# Altium PCB TFT_OLED_Board.PcbDoc
Units mm, origin at the board's own origin, x right, y up, seen from the top; angles counter-clockwise.
Board outline 96.51 x 142.34 mm, 2 copper layers (Top Layer, Bottom Layer); 24 components, 54 nets, 150 pads, 32 vias.
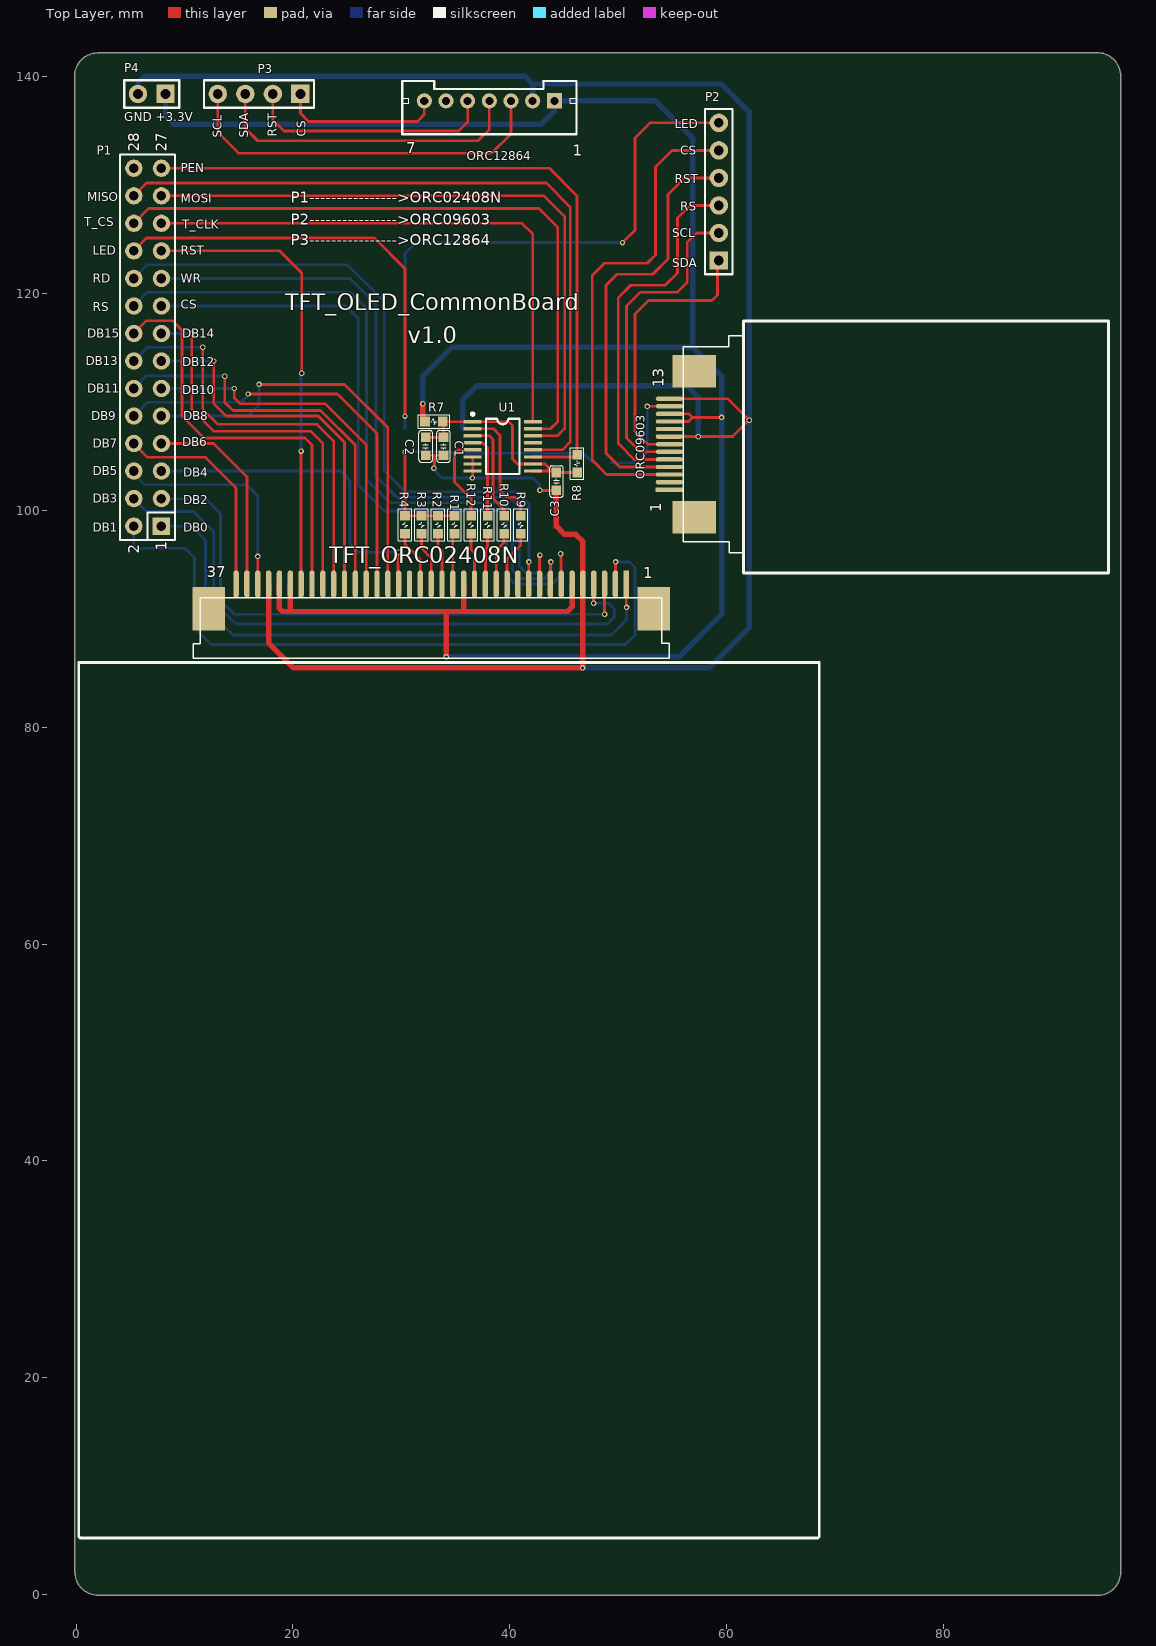
[diagram p0: Top Layer view]
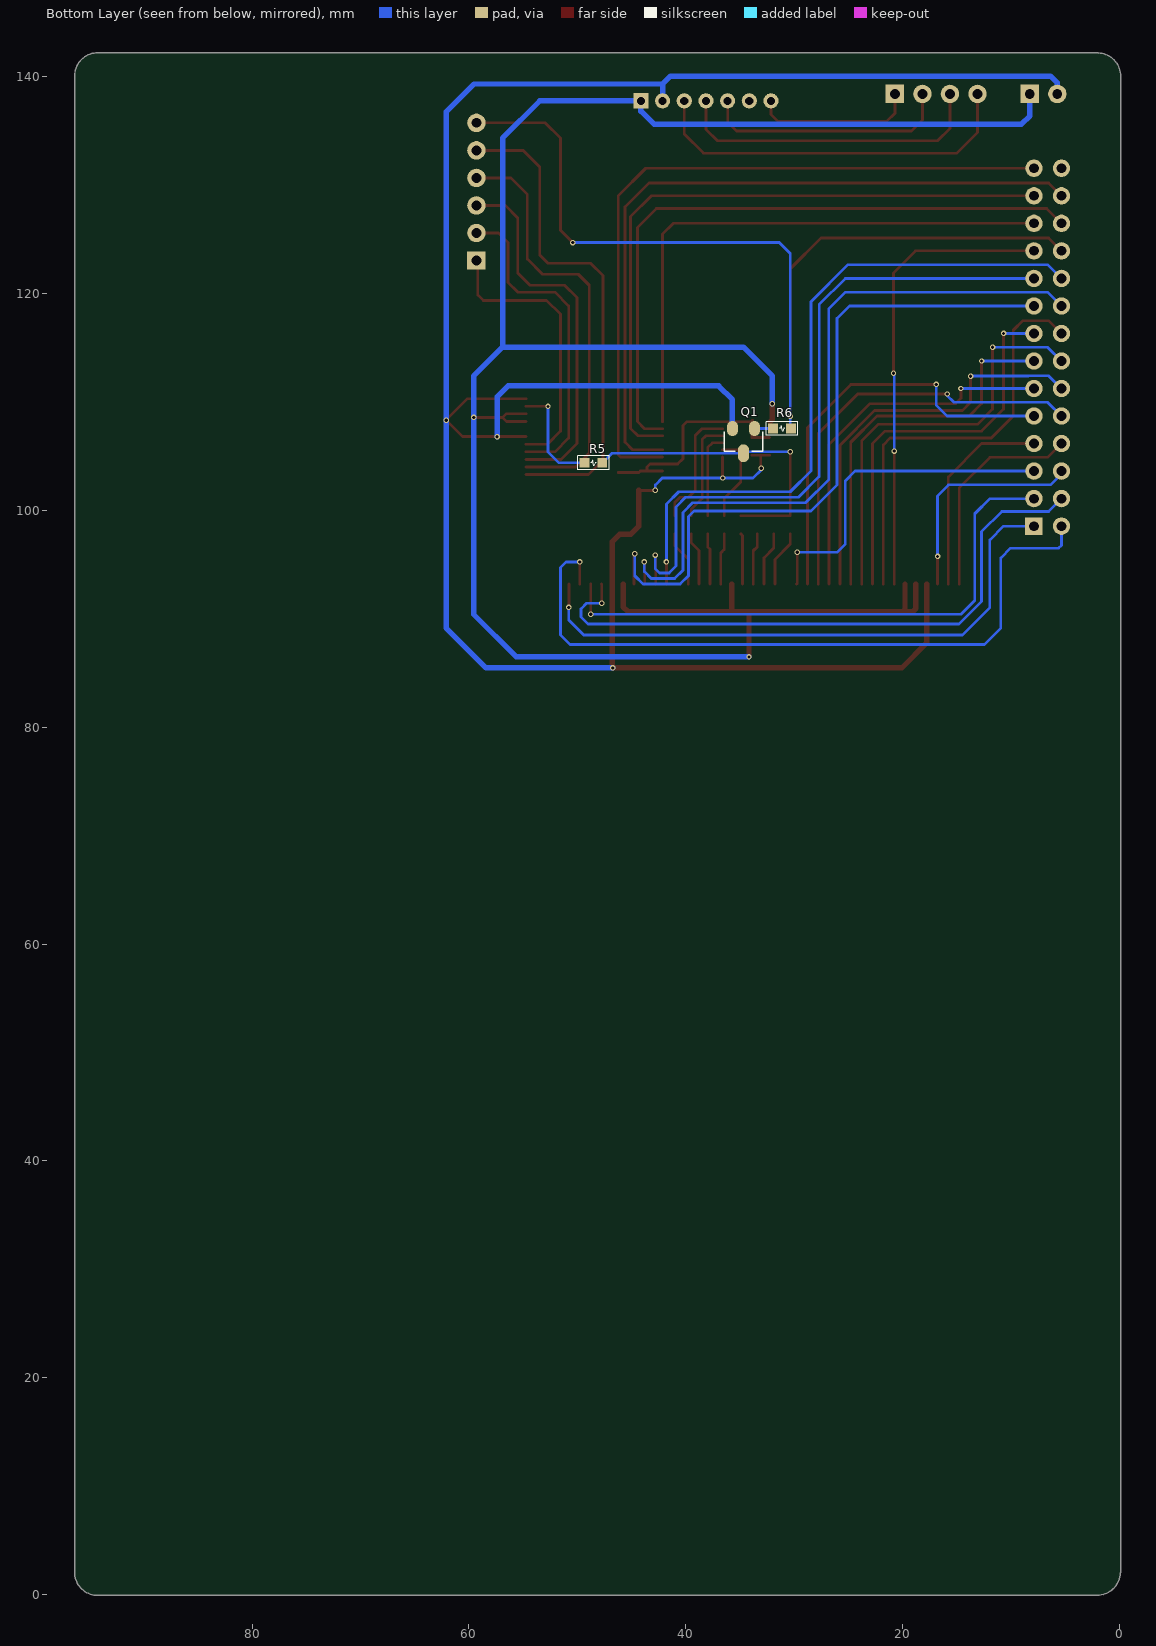
[diagram p1: Bottom Layer view, seen from below]

## Layer stack, top to bottom
Top Solder: solder mask 0.0102, Solder Resist, Dk 3.5
Top Layer: signal copper 0.0356
Dielectric 1: dielectric 0.32, FR-4, Dk 4.8
Bottom Layer: signal copper 0.0356
Bottom Solder: solder mask 0.0102, Solder Resist, Dk 3.5

## Board outline
2.031,-0.086 cw(c2.032,2.041) -0.094,1.955 cw(c0,2.041) -0.127,2.041 -0.127,140.08 -0.127,140.081 cw(c2,140.081) 1.947,142.208 cw(c2.032,142.113) 2.032,142.24 94.219,142.24 cw(c94.219,142.113) 94.229,142.24 cw(c94.219,140.081) 96.378,140.083 cw(c94.219,140.081) 96.378,140.081 ccw(c96.251,140.081) 96.378,140.083 96.378,140.081 96.378,2.032 ccw(c96.251,2.032) 96.378,2.034 96.378,2.032 cw(c94.251,2.032) 94.251,-0.095 cw(c94.251,0.032) 94.204,-0.086 2.032,-0.086 cw(c2.032,0.041)

## Design rules (kind name [scope] priority, off if disabled: settings)
Clearance [All] p1: gap=0.254 ignorepadtopadclearanceinfootprint=FALSE except(0: Arc-Hole Track-Hole SMDPad-Hole THPad-Hole Via-Hole Fill-Hole Poly-Hole Region-Hole Text-Hole)
PolygonConnect [All] p1: connectstyle=Relief reliefconductorwidth=0.254 reliefentries=4 polygonreliefangle="90 Angle" airgapwidth=0.254
RoutingVias [All] p1: holewidth=0.4 width=0.6 viastyle="Through Hole" minholewidth=0.3 minwidth=0.3 maxholewidth=0.711 maxwidth=1
SolderMaskExpansion [All] p1: expansion=0.102
Width [All] p1: maxlimit=1 minlimit=0.254 preferedwidth=0.254
30 further rules are at their usual default settings.

## Components (designator, comment, footprint, x,y, rotation, side; value= is the part's Value field where it differs from the comment)
C1 "10uF" C0603 33.909,105.918 r270 top
C2 "100nF" C0603 32.258,105.918 r270 top
C3 "100nF" C0603 44.323,102.679 r270 top
ORC09603 "TFT_LCD, ORC09603" "FPC  0.3  13P" 54.737,106.113 r270 top (schematic designator TFTLCD2)
ORC12864 "OLED, ORC12864, PCB" "PH2.0  7P" 38.132,137.795 r180 top (schematic designator OLED)
P1 "HDR  2.54MM  2X14" HDR-14X2 6.604,115.062 r90 top
P2 "HDR  2.54MM  1X6_M" HDR-1X6_M 59.309,129.413 r90 top
P3 "HDR  2.54MM  1X4" HDR-1X4 16.891,138.43 r180 top
P4 "HDR  2.54MM  1X2" HDR-1x2 6.985,138.43 r180 top
Q1 "S8050" "SOT 23" 34.671,106.426 r0 bottom
R1 "10R" R0603 34.925,98.679 r270 top
R2 "10R" R0603 33.401,98.679 r270 top
R3 "10R" R0603 31.877,98.679 r270 top
R4 "10R" R0603 30.353,98.679 r270 top
R5 "10R" R0603 48.514,104.394 r0 bottom
R6 "1k" R0603 31.115,107.569 r0 bottom
R7 "10R" R0603 33.02,108.204 r0 top
R8 "100k" R0603 46.228,104.331 r270 top
R9 "0R" R0603 41.021,98.679 r270 top
R10 "0R" R0603 39.497,98.679 r270 top
R11 "0R" R0603 37.973,98.679 r270 top
R12 "0R" R0603 36.449,98.679 r270 top
TFT_ORC02408N "TFTLCD, ORC02408N" "FPC  1.0  37P 0.6" 32.793,93.193 r0 top (schematic designator TFT_LCD1)
U1 "XPT2046" "TSSOP 16" 39.37,105.918 r0 top

## Footprints (in the part's own frame and the unit in brackets; to place one, negate y for a bottom-side part, rotate by r counter-clockwise, add the part's x,y. Pads: shape width x height; smd on the part's side, far side on the other; paste and mask are expansions set on the pad)
C0603 [mil] "0603-100nF/25V    104K    贴片层叠电容"
  rect 35x35 smd: 1(-32.5,0) 2(32.5,0)
  silkscreen extent -58,-25 58,25, body extent -31,-16 32,16, height 32
"FPC  0.3  13P" [mm] "13 Pins"
  rect 3x4 smd: 0(-6.72,2.289) 0(6.72,2.289)
  rect 0.4x2.5 smd: 1(4.2,0)
  oval 0.4x2.5 smd: 2(3.5,0) 3(2.8,0) 4(2.1,0) 5(1.4,0) 6(0.7,0) 7(0,0) 8(-0.7,0) 9(-1.4,0) 10(-2.1,0) 11(-2.8,0) 12(-3.5,0) 13(-4.2,0)
  silkscreen extent -10,1.29 10,6.83
"FPC  1.0  37P 0.6" [mm] "37 Pins"
  rect 3x4 smd: 0(-20.545,-2.263) 0(20.495,-2.263)
  rect 0.5x2.5 smd: 1(17.975,0.025)
  oval 0.5x2.5 smd: 2(16.975,0.025) 3(15.975,0.025) 4(14.975,0.025) 5(13.975,0.025) 6(12.975,0.025) 7(11.975,0.025) 8(10.975,0.025) 9(9.975,0.025) 10(8.975,0.025) 11(7.975,0.025) 12(6.975,0.025) 13(5.975,0.025) 14(4.975,0.025) 15(3.975,0.025) 16(2.975,0.025) 17(1.975,0.025) 18(0.975,0.025) 19(-0.025,0.025) 20(-1.025,0.025) 21(-2.025,0.025) 22(-3.025,0.025) 23(-4.025,0.025) 24(-5.025,0.025) 25(-6.025,0.025) 26(-7.025,0.025) 27(-8.025,0.025) 28(-9.025,0.025) 29(-10.025,0.025) 30(-11.025,0.025) 31(-12.025,0.025) 32(-13.025,0.025) 33(-14.025,0.025) 34(-15.025,0.025) 35(-16.025,0.025) 36(-17.025,0.025) 37(-18.025,0.025)
  silkscreen extent -21.97,-6.81 21.92,-1.27
HDR-1x2 [mm] "排针，2脚"
  rect 1.7x1.7 hole 0.9: 1(-1.27,0)
  round 1.7 hole 0.9: 2(1.27,0)
  silkscreen extent -2.54,-1.27 2.54,1.27, body extent -2.54,-1.27 2.54,1.27, height 8.5
HDR-1X4 [mm] "排针，4脚"
  rect 1.7x1.7 hole 0.9: 1(-3.81,0)
  round 1.7 hole 0.9: 2(-1.27,0) 3(1.27,0) 4(3.81,0)
  silkscreen extent -5.08,-1.27 5.08,1.27, body extent -5.08,-1.27 5.08,1.27, height 8.5
HDR-1X6_M [mm] "排母，6脚"
  rect 1.7x1.7 hole 0.9: 1(-6.35,0)
  round 1.7 hole 0.9: 2(-3.81,0) 3(-1.27,0) 4(1.27,0) 5(3.81,0) 6(6.35,0)
  silkscreen extent -7.62,-1.27 7.62,1.27, body extent -7.62,-1.27 7.62,1.27, height 8.5
HDR-14X2 [mm] "双排排针，14x2脚"
  rect 1.6x1.6 hole 0.9: 1(-16.51,-1.27)
  round 1.6 hole 0.9: 2(-16.51,1.27) 3(-13.97,-1.27) 4(-13.97,1.27) 5(-11.43,-1.27) 6(-11.43,1.27) 7(-8.89,-1.27) 8(-8.89,1.27) 9(-6.35,-1.27) 10(-6.35,1.27) 11(-3.81,-1.27) 12(-3.81,1.27) 13(-1.27,-1.27) 14(-1.27,1.27) 15(1.27,-1.27) 16(1.27,1.27) 17(3.81,-1.27) 18(3.81,1.27) 19(6.35,-1.27) 20(6.35,1.27) 21(8.89,-1.27) 22(8.89,1.27) 23(11.43,-1.27) 24(11.43,1.27) 25(13.97,-1.27) 26(13.97,1.27) 27(16.51,-1.27) 28(16.51,1.27)
  silkscreen extent -17.78,-2.54 17.78,2.54, body extent -17.78,-2.54 17.78,2.54, height 8.5
"PH2.0  7P" [mm] "接插件/1A"
  rect 1.4x1.4 hole 0.75: 1(-6,0)
  round 1.4 hole 0.75: 2(-4,0) 3(-2,0) 4(0,0) 5(2,0) 6(4,0) 7(6,0)
  silkscreen extent -8.03,-1.82 8.03,3.08, body extent -7.95,-1.7 7.95,3, height 6.02
R0603 [mil]
  rect 35x35 smd: 1(-32.5,0) 2(32.5,0)
  silkscreen extent -58,-25 58,25, body extent -31,-16 31,15, height 16
"SOT 23" [mil]
  oval 40x55 smd: 1(-40,-45) 2(40,-45)
  oval 40x65 smd: 3(0,45)
  silkscreen extent -70,-33 70,37, body extent -59,-47 59,47, height 41
"TSSOP 16" [mm] "2046"
  rect 1.65x0.3 smd: 1(-2.775,2.275) 2(-2.775,1.625) 3(-2.775,0.975) 4(-2.775,0.325) 5(-2.775,-0.325) 6(-2.775,-0.975) 7(-2.775,-1.625) 8(-2.775,-2.275) 9(2.775,-2.275) 10(2.775,-1.625) 11(2.775,-0.975) 12(2.775,-0.325) 13(2.775,0.325) 14(2.775,0.975) 15(2.775,1.625) 16(2.775,2.275)
  silkscreen extent -2.9,-2.55 1.55,3.1, body extent -3.2,-2.5 3.2,2.5, height 1.1

## Part data
C1: library part "CAP 1206-10uF/50V", "1206-10UF/50V  106K 贴片层叠电容"
C2 C3: library part "CAP 1206-100nF/50V", "1206-100nF/50V-J5 104K 贴片层叠电容"
ORC09603: library part TFT_ORC09603
ORC12864: library part OLED_ORC12864
Q1: library part NPN
R1 R2 R3 R4 R5 R6 R7 R8 R9 R10 R11 R12: library part "RES  0603  0R", "0603  0R  5%  贴片电阻", 助记码=0603, 物料代码=3.01.0, 物料名称=0603
TFT_ORC02408N: library part TFT_ORC02408N
U1: "HR2046贴片IC", 助记码=HR, 物料代码=3.0

## Via types
v1: diameter 0.5, hole 0.3, Top Layer to Bottom Layer, 32 vias

## Nets (pads, with @x,y where several pads share a name; then routed paths per layer and width w, separated by ;. In a path a pad name is that pad's centre, name@x,y a point inside that pad or via, vN(x,y) a via of type N, cw(c..) or ccw(c..) an arc to the next point about the centre after c; other vN are vias at no path point)
3.3V: ORC09603.10 ORC09603.11 ORC12864.1 P4.1 R7.1 TFT_ORC02408N.6 TFT_ORC02408N.16 TFT_ORC02408N.32 TFT_ORC02408N.33 | length 204.4
  Top Layer w0.254: TFT_ORC02408N.32@19.685,93.135 TFT_ORC02408N.32 ; 35.768,90.724 35.814,90.678 ; ORC09603.10 56.524,108.213 56.896,108.585 ; ORC09603.11 56.568,108.913 56.896,108.585 ; v1(59.563,108.585) 56.896,108.585
  Top Layer w0.5: TFT_ORC02408N.33 18.768,90.96 19.05,90.678 19.685,90.678 ; TFT_ORC02408N.32 19.768,90.849 19.939,90.678 34.036,90.678 ; v1(32.004,109.855) 32.004,108.394 R7.1 ; v1(34.163,86.487) 34.163,90.551 34.036,90.678 ; 35.768,90.724 TFT_ORC02408N.16 ; TFT_ORC02408N.6 45.768,91.107 45.339,90.678 35.814,90.678 34.036,90.678
  Bottom Layer w0.5: P4.1 8.255,136.398 9.017,135.636 42.926,135.636 44.132,136.842 ORC12864.1 53.467,137.795 56.896,134.366 56.896,115.062 ; v1(32.004,109.855) 32.004,112.395 34.671,115.062 56.896,115.062 ; v1(34.163,86.487) 55.626,86.487 59.563,90.424 v1(59.563,108.585) 59.563,112.395 56.896,115.062
CS1: P1.17 TFT_ORC02408N.7 | length 64.8
  Top Layer w0.254: v1(44.704,96.012) 44.768,95.948 TFT_ORC02408N.7
  Bottom Layer w0.254: P1.17 24.892,118.872 26.035,117.729 26.035,102.362 28.448,99.949 39.243,99.949 39.751,99.441 39.751,93.98 40.513,93.218 43.942,93.218 44.704,93.98 v1(44.704,96.012)
CS2: ORC09603.7 P2.1 | length 26
  Top Layer w0.254: ORC09603.7 52.764,106.113 51.562,107.315 51.562,118.11 52.832,119.38 58.674,119.38 59.182,119.888 P2.1@59.182,123.063
CS3: ORC12864.7 P3.1 | length 15.1
  Top Layer w0.254: P3.1 20.701,136.652 21.463,135.89 31.496,135.89 32.132,136.526 ORC12864.7
DB0: P1.1 TFT_ORC02408N.1 | length 54.6
  Top Layer w0.254: TFT_ORC02408N.1 50.768,91.091 v1(50.8,91.059)
  Bottom Layer w0.254: P1.1 10.668,98.552 11.938,97.282 11.938,91.059 14.478,88.519 49.403,88.519 50.8,89.916 v1(50.8,91.059)
DB1: P1.2 TFT_ORC02408N.2 | length 66.2
  Top Layer w0.254: TFT_ORC02408N.2 49.784,93.234 v1(49.784,95.25)
  Bottom Layer w0.254: P1.2 5.334,96.774 5.588,96.52 10.033,96.52 10.922,95.631 10.922,89.154 12.446,87.63 50.673,87.63 51.562,88.519 51.562,94.742 51.054,95.25 v1(49.784,95.25)
DB2: P1.3 TFT_ORC02408N.3 | length 52.8
  Top Layer w0.254: v1(48.768,90.424) TFT_ORC02408N.3
  Bottom Layer w0.254: P1.3 11.938,101.092 13.335,99.695 13.335,91.694 14.605,90.424 v1(48.768,90.424)
DB3: P1.4 TFT_ORC02408N.4 | length 57.8
  Top Layer w0.254: v1(47.752,91.44) 47.752,93.202 TFT_ORC02408N.4
  Bottom Layer w0.254: P1.4 6.515,99.911 10.833,99.911 12.7,98.044 12.7,91.611 14.776,89.535 49.022,89.535 49.657,90.17 49.657,90.924 49.141,91.44 v1(47.752,91.44)
DB4: P1.5 TFT_ORC02408N.22 | length 31.3
  Top Layer w0.254: v1(29.718,96.139) 29.718,93.268 TFT_ORC02408N.22
  Bottom Layer w0.254: P1.5 24.384,103.632 25.273,102.743 25.273,96.901 26.035,96.139 v1(29.718,96.139)
DB5: P1.6 TFT_ORC02408N.35 | length 20.7
  Top Layer w0.254: v1(16.764,95.758) 16.764,93.222 TFT_ORC02408N.35
  Bottom Layer w0.254: P1.6 5.334,103.378 6.35,102.362 15.748,102.362 16.764,101.346 v1(16.764,95.758)
DB6: P1.7 TFT_ORC02408N.36 | length 19.1
  Top Layer w0.254: P1.7 12.7,106.172 15.768,103.104 TFT_ORC02408N.36
DB7: P1.8 TFT_ORC02408N.37 | length 20
  Top Layer w0.254: P1.8 6.604,104.902 11.938,104.902 14.768,102.072 TFT_ORC02408N.37
DB8: P1.9 TFT_ORC02408N.23 | length 39.3
  Top Layer w0.254: v1(16.891,111.633) 24.765,111.633 28.768,107.63 TFT_ORC02408N.23
  Bottom Layer w0.254: P1.9 15.875,108.712 16.891,109.728 v1(16.891,111.633)
DB9: P1.10 TFT_ORC02408N.24 | length 38.7
  Top Layer w0.254: v1(15.875,110.744) 24.13,110.744 27.768,107.106 TFT_ORC02408N.24
  Bottom Layer w0.254: P1.10 6.604,109.982 15.24,109.982 15.875,110.617 v1(15.875,110.744)
DB10: P1.11 TFT_ORC02408N.25 | length 34.4
  Top Layer w0.254: v1(14.605,111.252) 14.605,110.363 15.113,109.855 22.987,109.855 26.768,106.074 TFT_ORC02408N.25
  Bottom Layer w0.254: P1.11 v1(14.605,111.252)
DB11: P1.12 TFT_ORC02408N.26 | length 37.8
  Top Layer w0.254: v1(13.716,112.395) 13.716,109.982 14.478,109.22 22.562,109.22 25.768,106.014 TFT_ORC02408N.26
  Bottom Layer w0.254: P1.12 6.515,112.433 8.363,112.433 8.401,112.395 v1(13.716,112.395)
DB12: P1.13 TFT_ORC02408N.27 | length 35.4
  Top Layer w0.254: v1(12.7,113.792) 12.7,109.855 13.843,108.712 22.352,108.712 24.768,106.296 TFT_ORC02408N.27
  Bottom Layer w0.254: P1.13 v1(12.7,113.792)
DB13: P1.14 TFT_ORC02408N.28 | length 39.1
  Top Layer w0.254: v1(11.684,115.062) 11.684,109.347 13.081,107.95 22.244,107.95 23.768,106.426 TFT_ORC02408N.28
  Bottom Layer w0.254: P1.14 6.604,115.062 v1(11.684,115.062)
DB14: P1.15 TFT_ORC02408N.29 | length 36.1
  Top Layer w0.254: v1(10.668,116.332) 10.668,109.347 12.7,107.315 21.625,107.315 22.768,106.172 TFT_ORC02408N.29
  Bottom Layer w0.254: P1.15 v1(10.668,116.332)
DB15: P1.16 TFT_ORC02408N.30 | length 39.1
  Top Layer w0.254: P1.16 6.515,117.513 8.89,117.513 9.779,116.624 9.779,108.712 11.811,106.68 21.133,106.68 21.768,106.045 TFT_ORC02408N.30
GND: C1.2 C2.2 C3.2 ORC09603.8 ORC09603.13 ORC12864.2 P4.2 Q1.2 TFT_ORC02408N.5 TFT_ORC02408N.34 U1.6 U1.7 U1.8 | length 241
  Top Layer w0.254: C2.2 33.084,105.093 ; v1(33.02,103.886) 33.084,103.95 33.084,105.093 ; C1.2 33.084,105.093 ; v1(36.576,102.997) 36.595,103.016 U1.8 U1.7 U1.6 ; v1(42.799,101.854) C3.2 ; ORC09603.8 60.585,106.813 v1(62.103,108.331) 60.121,110.313 ORC09603.13
  Top Layer w0.5: TFT_ORC02408N.34 17.768,87.769 20.066,85.471 v1(46.736,85.471) 46.768,85.503 TFT_ORC02408N.5 46.768,97.123 46.101,97.79 45.085,97.79 44.323,98.552 C3.2
  Bottom Layer w0.254: v1(33.02,103.886) 33.02,103.759 33.782,102.997 v1(36.576,102.997) 42.164,102.997 42.799,102.362 v1(42.799,101.854)
  Bottom Layer w0.5: P4.2 5.715,139.446 6.35,140.081 41.402,140.081 42.132,139.351 ; Q1.2 35.687,110.236 36.957,111.506 56.388,111.506 57.404,110.49 v1(57.404,106.807) ; ORC12864.2 42.132,139.351 ; v1(46.736,85.471) 58.42,85.471 62.103,89.154 v1(62.103,108.331) 62.103,136.779 59.531,139.351 42.132,139.351
LED_CTRL: P1.22 P2.6 R6.1 | length 95.2
  Top Layer w0.254: P1.22 6.515,125.133 27.521,125.133 30.353,122.301 v1(30.353,108.712) ; v1(50.419,124.714) 51.562,125.857 51.562,134.366 52.959,135.763 P2.6@59.182,135.763
  Bottom Layer w0.254: R6.1 30.353,107.632 v1(30.353,108.712) 30.353,123.698 31.369,124.714 v1(50.419,124.714)
LED_K: Q1.3 R1.1 R2.1 R3.1 R4.1 R5.1 | length 28.2
  Top Layer w0.254: v1(30.353,105.41) R4.1 R3.1 R2.1 R1.1
  Bottom Layer w0.254: v1(30.353,105.41) 34.544,105.41 Q1.3 46.799,105.283 R5.1
NetC1_1: C1.1 C2.1 C3.1 R7.2 R8.2 U1.1 U1.9 U1.10 | length 21
  Top Layer w0.254: C2.1 C1.1 R7.2@33.909,108.267 ; R7.2@33.846,108.331 R7.2@33.909,108.267 ; U1.9 43.561,103.643 ; R8.2 C3.1 44.185,103.643 43.561,103.643 ; R7.2@33.909,108.267 33.983,108.193 U1.1 39.889,108.193 40.259,107.823 40.259,104.775 40.741,104.293 U1.10 43.281,104.293 43.561,104.013 43.561,103.643
NetQ1_1: Q1.1 R6.2 | length 1.7
  Bottom Layer w0.254: R6.2 Q1.1
NetR1_2: R1.2 TFT_ORC02408N.17 | length 4.7
  Top Layer w0.254: TFT_ORC02408N.17 34.768,97.697 R1.2
NetR2_2: R2.2 TFT_ORC02408N.18 | length 4.8
  Top Layer w0.254: R2.2 33.401,96.647 33.768,96.28 TFT_ORC02408N.18
NetR3_2: R3.2 TFT_ORC02408N.19 | length 5
  Top Layer w0.254: R3.2 31.877,96.52 32.768,95.629 TFT_ORC02408N.19
NetR4_2: R4.2 TFT_ORC02408N.20 | length 5.2
  Top Layer w0.254: R4.2 30.353,96.901 31.768,95.486 TFT_ORC02408N.20
NetR5_2: ORC09603.12 R5.2 | length 10
  Top Layer w0.254: v1(52.705,109.601) 52.717,109.613 ORC09603.12
  Bottom Layer w0.254: R5.2 51.689,104.394 52.705,105.41 v1(52.705,109.601)
NetR9_2: R9.2 TFT_ORC02408N.12 | length 5.2
  Top Layer w0.254: TFT_ORC02408N.12 39.768,95.521 41.021,96.774 R9.2
NetR10_2: R10.2 TFT_ORC02408N.13 | length 4.9
  Top Layer w0.254: TFT_ORC02408N.13 38.768,96.299 39.497,97.028 R10.2
NetR11_2: R11.2 TFT_ORC02408N.14 | length 4.7
  Top Layer w0.254: TFT_ORC02408N.14 37.768,96.442 37.973,96.647 R11.2
NetR12_2: R12.2 TFT_ORC02408N.15 | length 4.8
  Top Layer w0.254: R12.2 36.449,96.393 36.768,96.074 TFT_ORC02408N.15
RD1: P1.20 TFT_ORC02408N.10 | length 62.7
  Top Layer w0.254: TFT_ORC02408N.10 41.768,95.235 v1(41.783,95.25)
  Bottom Layer w0.254: P1.20 6.604,122.682 25.019,122.682 28.448,119.253 28.448,103.632 30.353,101.727 40.64,101.727 41.783,100.584 v1(41.783,95.25)
RS1: P1.18 TFT_ORC02408N.8 | length 65.5
  Top Layer w0.254: TFT_ORC02408N.8 43.768,95.203 v1(43.815,95.25)
  Bottom Layer w0.254: P1.18 6.604,120.142 25.273,120.142 26.797,118.618 26.797,102.87 28.956,100.711 39.37,100.711 40.259,99.822 40.259,94.488 41.021,93.726 43.18,93.726 43.815,94.361 v1(43.815,95.25)
RS2: ORC09603.5 P2.3 | length 34.5
  Top Layer w0.254: ORC09603.5 51.497,104.713 50.038,106.172 50.038,119.634 51.181,120.777 54.356,120.777 55.499,121.92 55.499,127 56.642,128.143 P2.3
RST1: P1.21 TFT_ORC02408N.31 | length 42.5
  Top Layer w0.254: P1.21 18.796,123.952 20.828,121.92 v1(20.828,112.649) ; TFT_ORC02408N.31 v1(20.768,105.477)
  Bottom Layer w0.254: v1(20.768,105.477) 20.768,112.589 v1(20.828,112.649)
RST2: ORC09603.6 P2.2 | length 30
  Top Layer w0.254: ORC09603.6 52.067,105.413 50.8,106.68 50.8,118.872 52.07,120.142 55.499,120.142 56.388,121.031 56.388,124.714 57.277,125.603 P2.2@59.182,125.603
RST3: ORC12864.5 P3.2 | length 23.1
  Top Layer w0.254: P3.2 18.161,136.017 19.177,135.001 35.306,135.001 36.132,135.827 ORC12864.5
SCL2: ORC09603.4 P2.4 | length 39.9
  Top Layer w0.254: ORC09603.4 50.165,104.013 48.895,105.283 48.895,120.777 49.911,121.793 53.213,121.793 54.61,123.19 54.61,129.159 56.134,130.683 P2.4
SCL3: ORC12864.3 P3.4 | length 35.2
  Top Layer w0.254: P3.4 13.081,134.874 14.986,132.969 38.354,132.969 40.132,134.747 ORC12864.3
SDA2: ORC09603.3 P2.5 | length 45.9
  Top Layer w0.254: ORC09603.3 48.96,103.313 47.625,104.648 47.625,121.666 48.768,122.809 52.705,122.809 53.467,123.571 53.467,131.699 54.991,133.223 P2.5
SDA3: ORC12864.4 P3.3 | length 29.2
  Top Layer w0.254: P3.3 15.621,135.255 16.764,134.112 37.084,134.112 38.132,135.16 ORC12864.4
T_CLK: P1.23 U1.16 | length 52
  Top Layer w0.254: P1.23 41.148,126.492 42.145,125.495 U1.16
T_CS: P1.24 U1.15 | length 60.9
  Top Layer w0.254: P1.24 6.693,127.851 42.71,127.851 44.45,126.111 44.45,108.204 43.789,107.543 U1.15
T_MISO: P1.26 U1.12 | length 67.1
  Top Layer w0.254: P1.26 6.515,130.213 43.396,130.213 45.593,128.016 45.593,106.299 44.887,105.593 U1.12
T_MOSI: P1.25 U1.14 | length 60.8
  Top Layer w0.254: P1.25 43.18,129.032 45.085,127.127 45.085,107.569 44.409,106.893 U1.14
T_PEN: P1.27 R8.1 U1.11 | length 67.5
  Top Layer w0.254: P1.27 43.688,131.572 46.228,129.032 R8.1 46.015,104.943 U1.11
WR1: P1.19 TFT_ORC02408N.9 | length 62.8
  Top Layer w0.254: TFT_ORC02408N.9 42.768,95.854 v1(42.799,95.885)
  Bottom Layer w0.254: P1.19 25.273,121.412 27.686,118.999 27.686,103.124 29.591,101.219 40.005,101.219 40.894,100.33 40.894,94.869 41.529,94.234 42.418,94.234 42.799,94.615 v1(42.799,95.885)
X+: R9.1 U1.2 | length 11.4
  Top Layer w0.254: U1.2 38.507,107.543 39.116,106.934 39.116,101.854 39.751,101.219 40.513,101.219 41.021,100.711 R9.1
X-: R11.1 U1.4 | length 7.9
  Top Layer w0.254: U1.4 37.521,106.243 37.973,105.791 R11.1
Y+: R10.1 U1.3 | length 9.5
  Top Layer w0.254: U1.3 38.141,106.893 38.481,106.553 38.481,101.092 39.497,100.076 R10.1
Y-: R12.1 U1.5 | length 8.2
  Top Layer w0.254: R12.1 36.449,101.092 34.925,102.616 34.925,105.283 35.235,105.593 U1.5
pads on no net: ORC09603.0 ORC09603.1 ORC09603.2 ORC09603.9 ORC12864.6 P1.28 TFT_ORC02408N.0 TFT_ORC02408N.11 TFT_ORC02408N.21 U1.13

## Silkscreen, mask and mechanical layers (free items; w line width, h text height)
Top Overlay:
  lines w0.254: 0.254,5.334 0.254,85.979 68.58,85.979 68.58,5.334 68.453,5.207 0.381,5.207 0.254,5.334 ; 61.595,94.234 95.25,94.234 95.25,117.475 61.595,117.475 61.595,94.234
  text "GND" at 4.445,135.89 h0.8
  text "+3.3V" at 7.366,135.89 h0.8
  text "LED" at 55.245,135.255 h0.8
  text "RST" at 18.542,134.493 h0.8 r90
  text "CS" at 21.209,134.493 h0.8 r90
  text "SCL" at 13.462,134.366 h0.8 r90
  text "SDA" at 15.875,134.366 h0.8 r90
  text "7" at 30.48,132.969 h1
  text "CS" at 55.753,132.842 h0.8
  text "1" at 45.847,132.715 h1
  text "PEN" at 9.652,131.191 h0.8
  text "RST" at 55.245,130.175 h0.8
  text "MISO" at 1.016,128.524 h0.8
  text "MOSI" at 9.652,128.397 h0.8
  text "P1---------------->ORC02408N" at 19.812,128.397 h1
  text "RS" at 55.753,127.635 h0.8
  text "P2---------------->ORC09603" at 19.812,126.365 h1
  text "T_CS" at 0.762,126.238 h0.8
  text "T_CLK" at 9.779,125.984 h0.8
  text "SCL" at 54.991,125.222 h0.8
  text "P3---------------->ORC12864" at 19.812,124.46 h1
  text "LED" at 1.524,123.571 h0.8
  text "RST" at 9.652,123.571 h0.8
  text "SDA" at 54.991,122.428 h0.8
  text "RD" at 1.524,121.031 h0.8
  text "WR" at 9.652,121.031 h0.8
  text "CS" at 9.652,118.618 h0.8
  text "TFT_OLED_CommonBoard" at 19.304,118.491 h1.5
  text "RS" at 1.524,118.364 h0.8
  text "DB15" at 1.016,115.951 h0.8
  text "DB14" at 9.779,115.951 h0.8
  text "v1.0" at 30.607,115.443 h1.5
  text "DB13" at 0.889,113.411 h0.8
  text "DB12" at 9.779,113.284 h0.8
  text "13" at 54.229,111.379 h1 r90
  text "DB11" at 1.016,110.871 h0.8
  text "DB10" at 9.779,110.744 h0.8
  text "DB9" at 1.397,108.331 h0.8
  text "DB8" at 9.906,108.331 h0.8
  text "DB6" at 9.779,105.918 h0.8
  text "DB7" at 1.524,105.791 h0.8
  text "DB5" at 1.524,103.251 h0.8
  text "DB4" at 9.906,103.124 h0.8
  text "DB3" at 1.524,100.711 h0.8
  text "DB2" at 9.906,100.584 h0.8
  text "1" at 53.975,99.822 h1 r90
  text "DB1" at 1.524,98.044 h0.8
  text "DB0" at 9.906,98.044 h0.8
  text "37" at 12.065,93.853 h1
  text "1" at 52.324,93.726 h1
Mechanical 1:
  lines w0.254: 0,2.041 0,140.081 cw(c2,140.081) 2,142.081 ; 0.032,2.041 ccw(c2.032,2.041) 2.032,0.041 94.26,0.041 ; 2.032,142.113 94.219,142.113 ; 94.251,0.032 ccw(c94.251,2.032) 96.251,2.032 96.251,140.081 ccw(c94.219,140.081) 94.219,142.113 ; 94.219,142.113 94.219,142.113

## Text inside footprints (layer, text, board x,y; h text height)
P1: Top Overlay "2" at 5.842,96.012 h1.02 r90; Top Overlay "1" at 8.382,96.266 h1.02 r90; Top Overlay "27" at 8.382,133.096 h1.02 r90; Top Overlay "28" at 5.842,133.096 h1.02 r90